# Altium PCB PCB1.PcbDoc
Units mm, origin at the board's own origin, x right, y up, seen from the top; angles counter-clockwise.
Board outline 88 x 76.5 mm, 4 copper layers (Top Layer, Int1 (GND), Int2 (PWR), Bottom Layer), stack 1.57 mm thick; 44 components, 65 nets, 257 pads, 114 vias.
Unrouted connection lines stored in the file: 24.
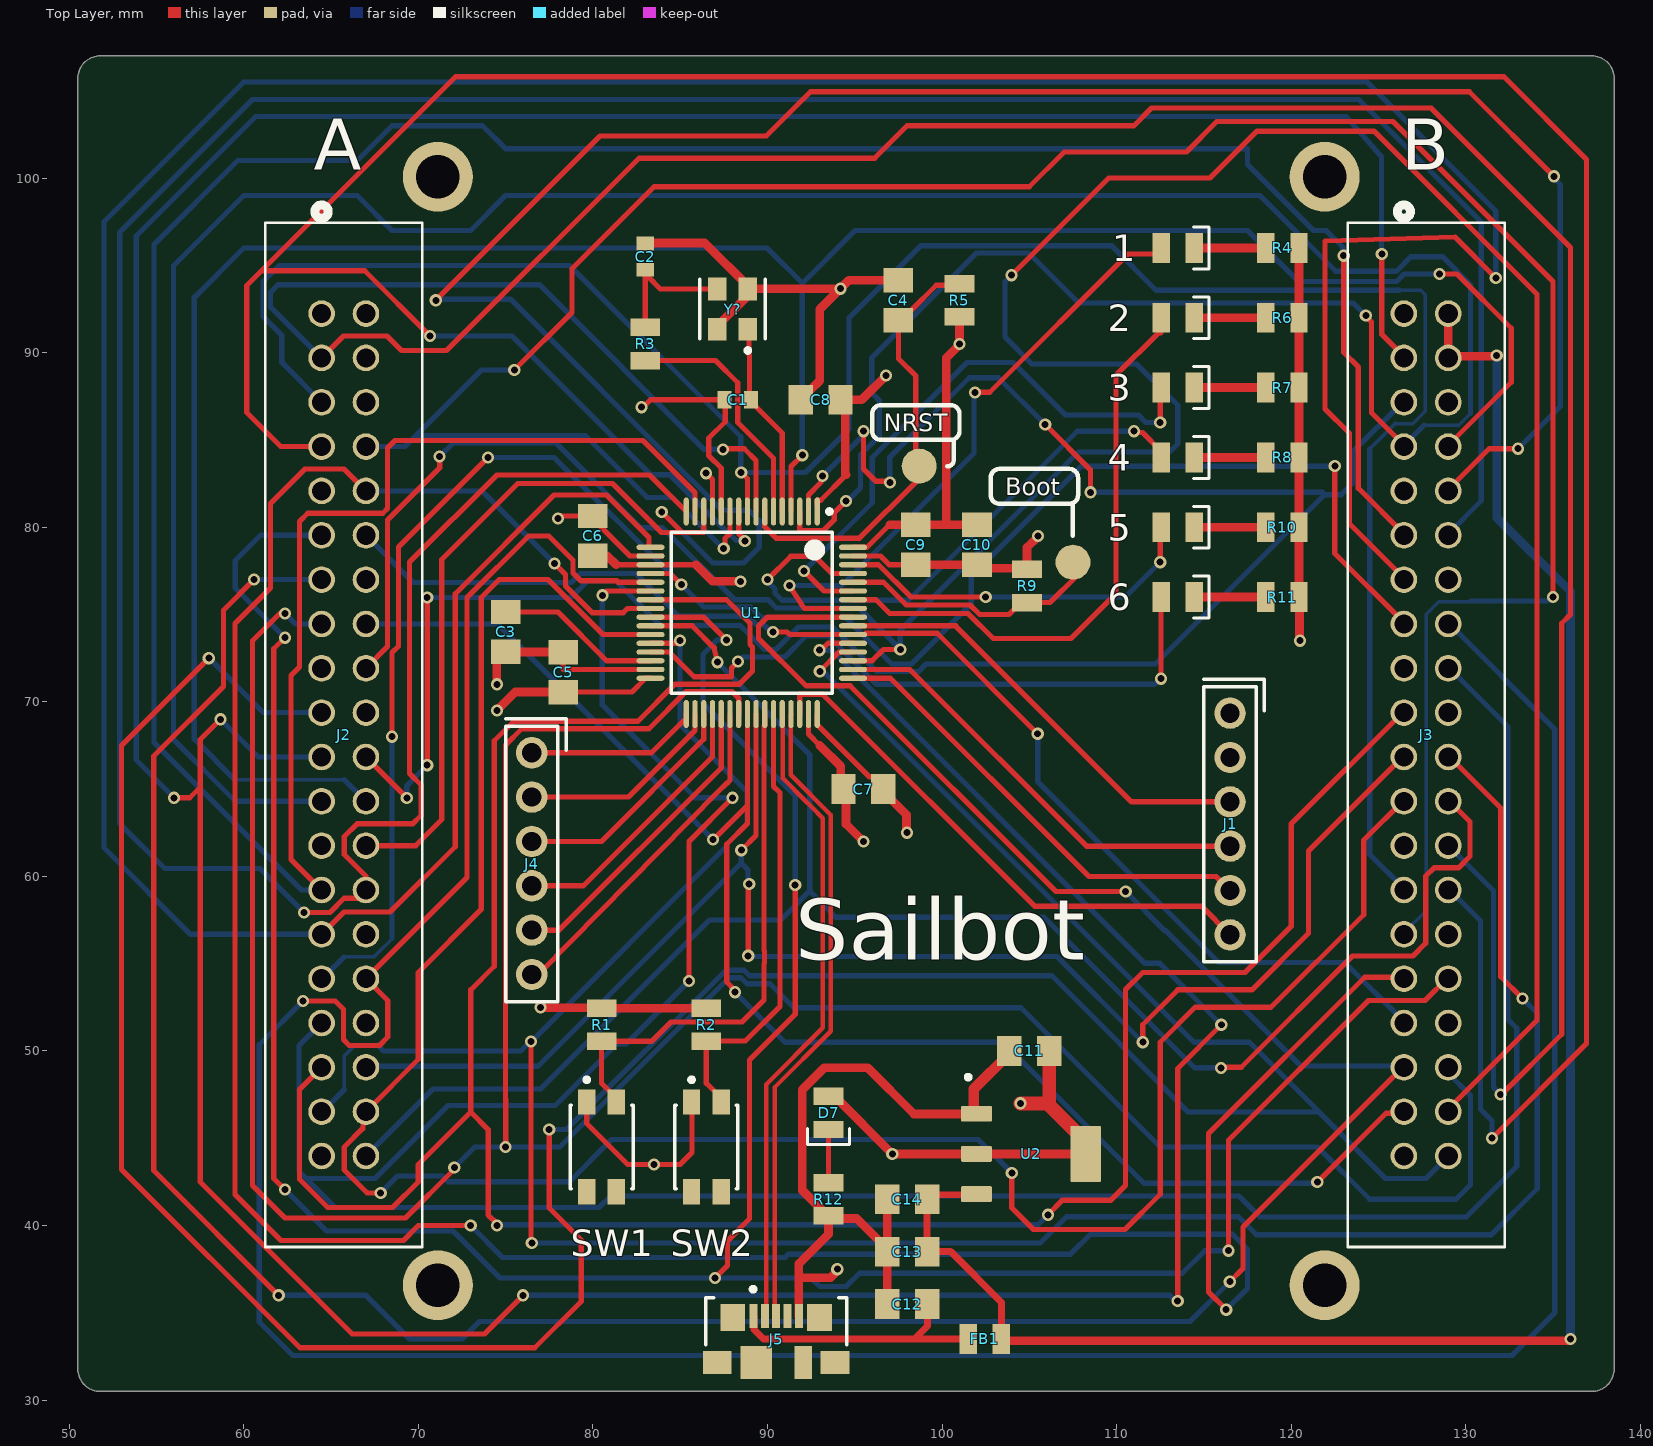
[diagram p0: Top Layer view]
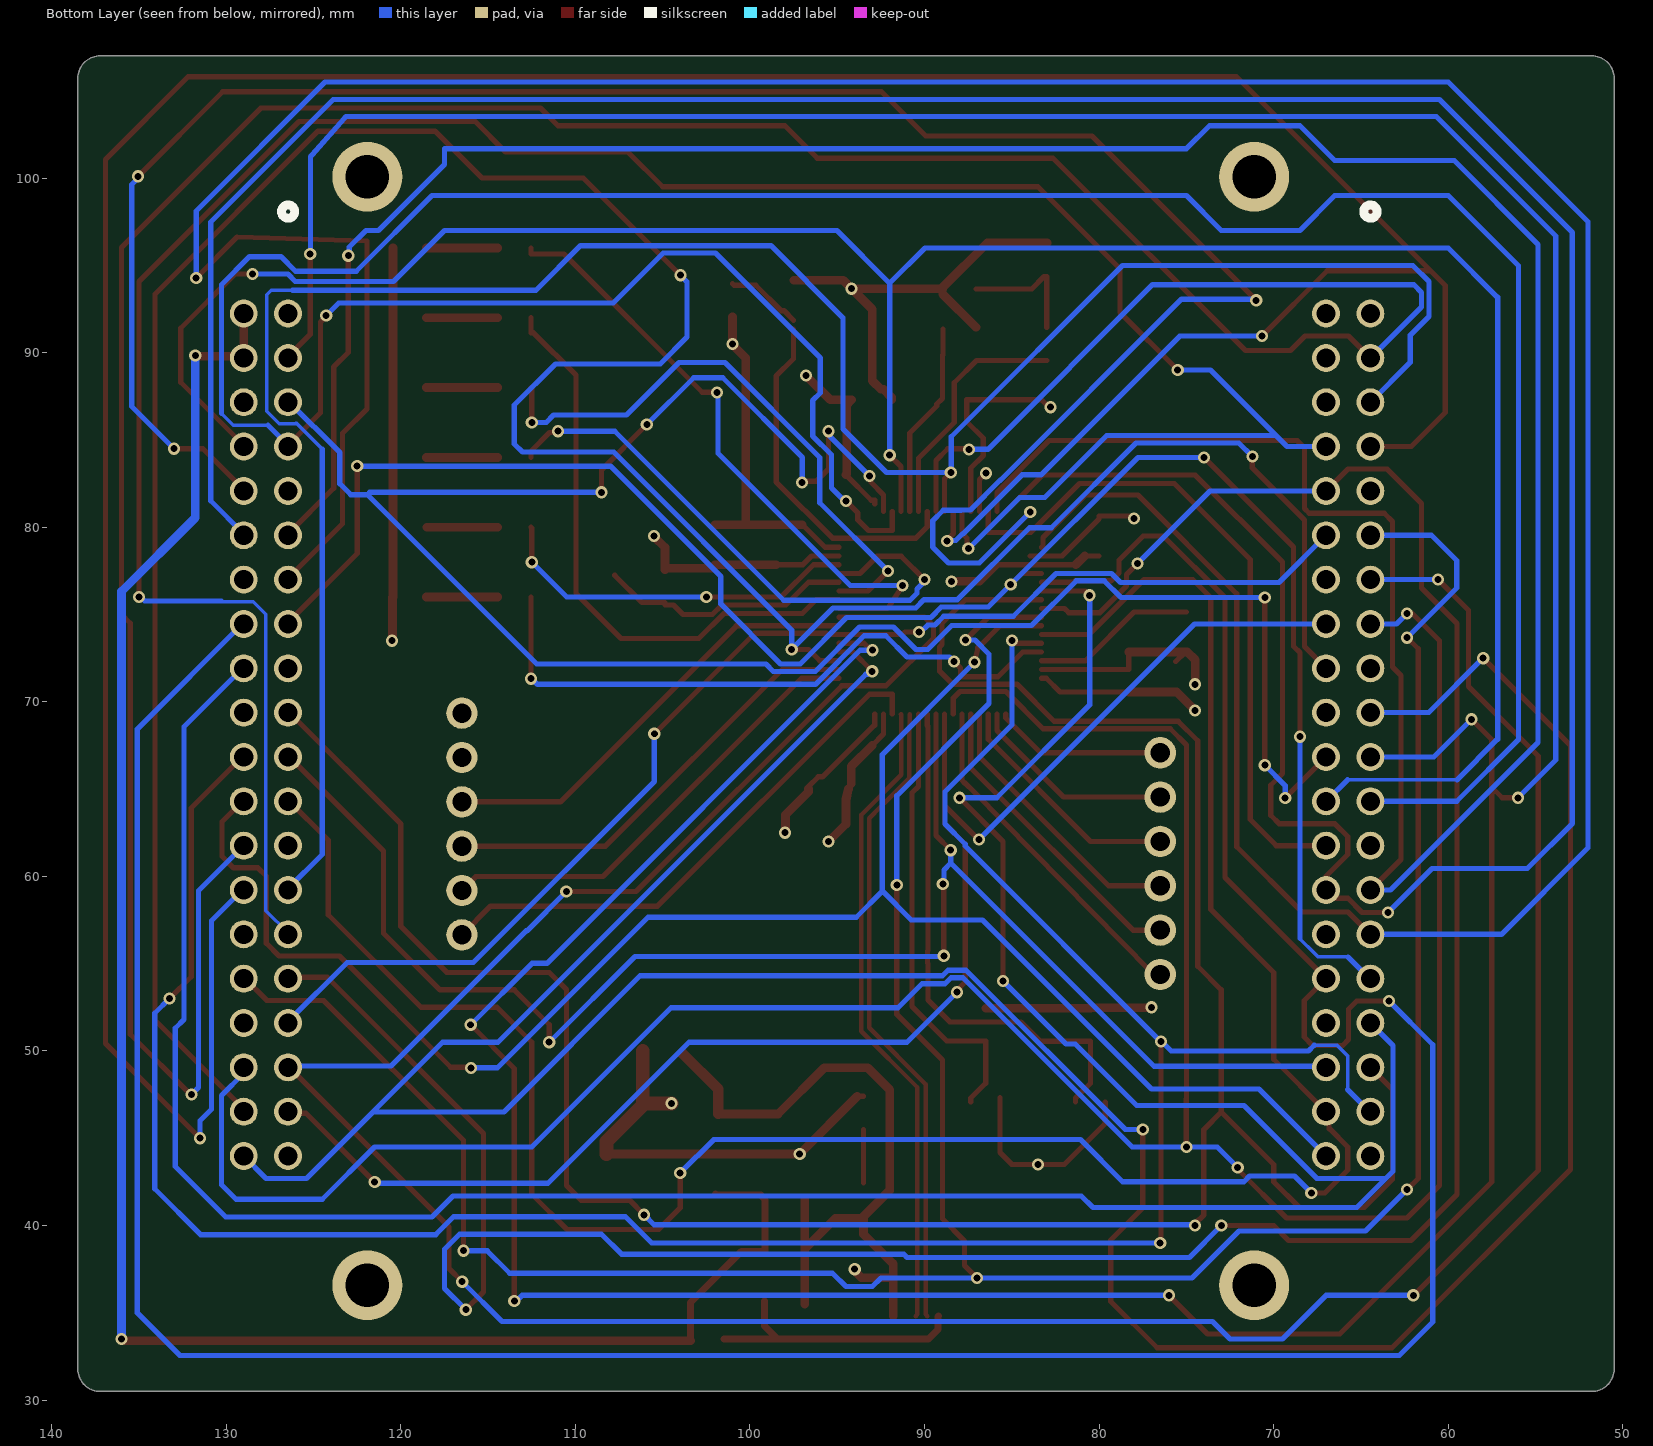
[diagram p1: Bottom Layer view, seen from below]
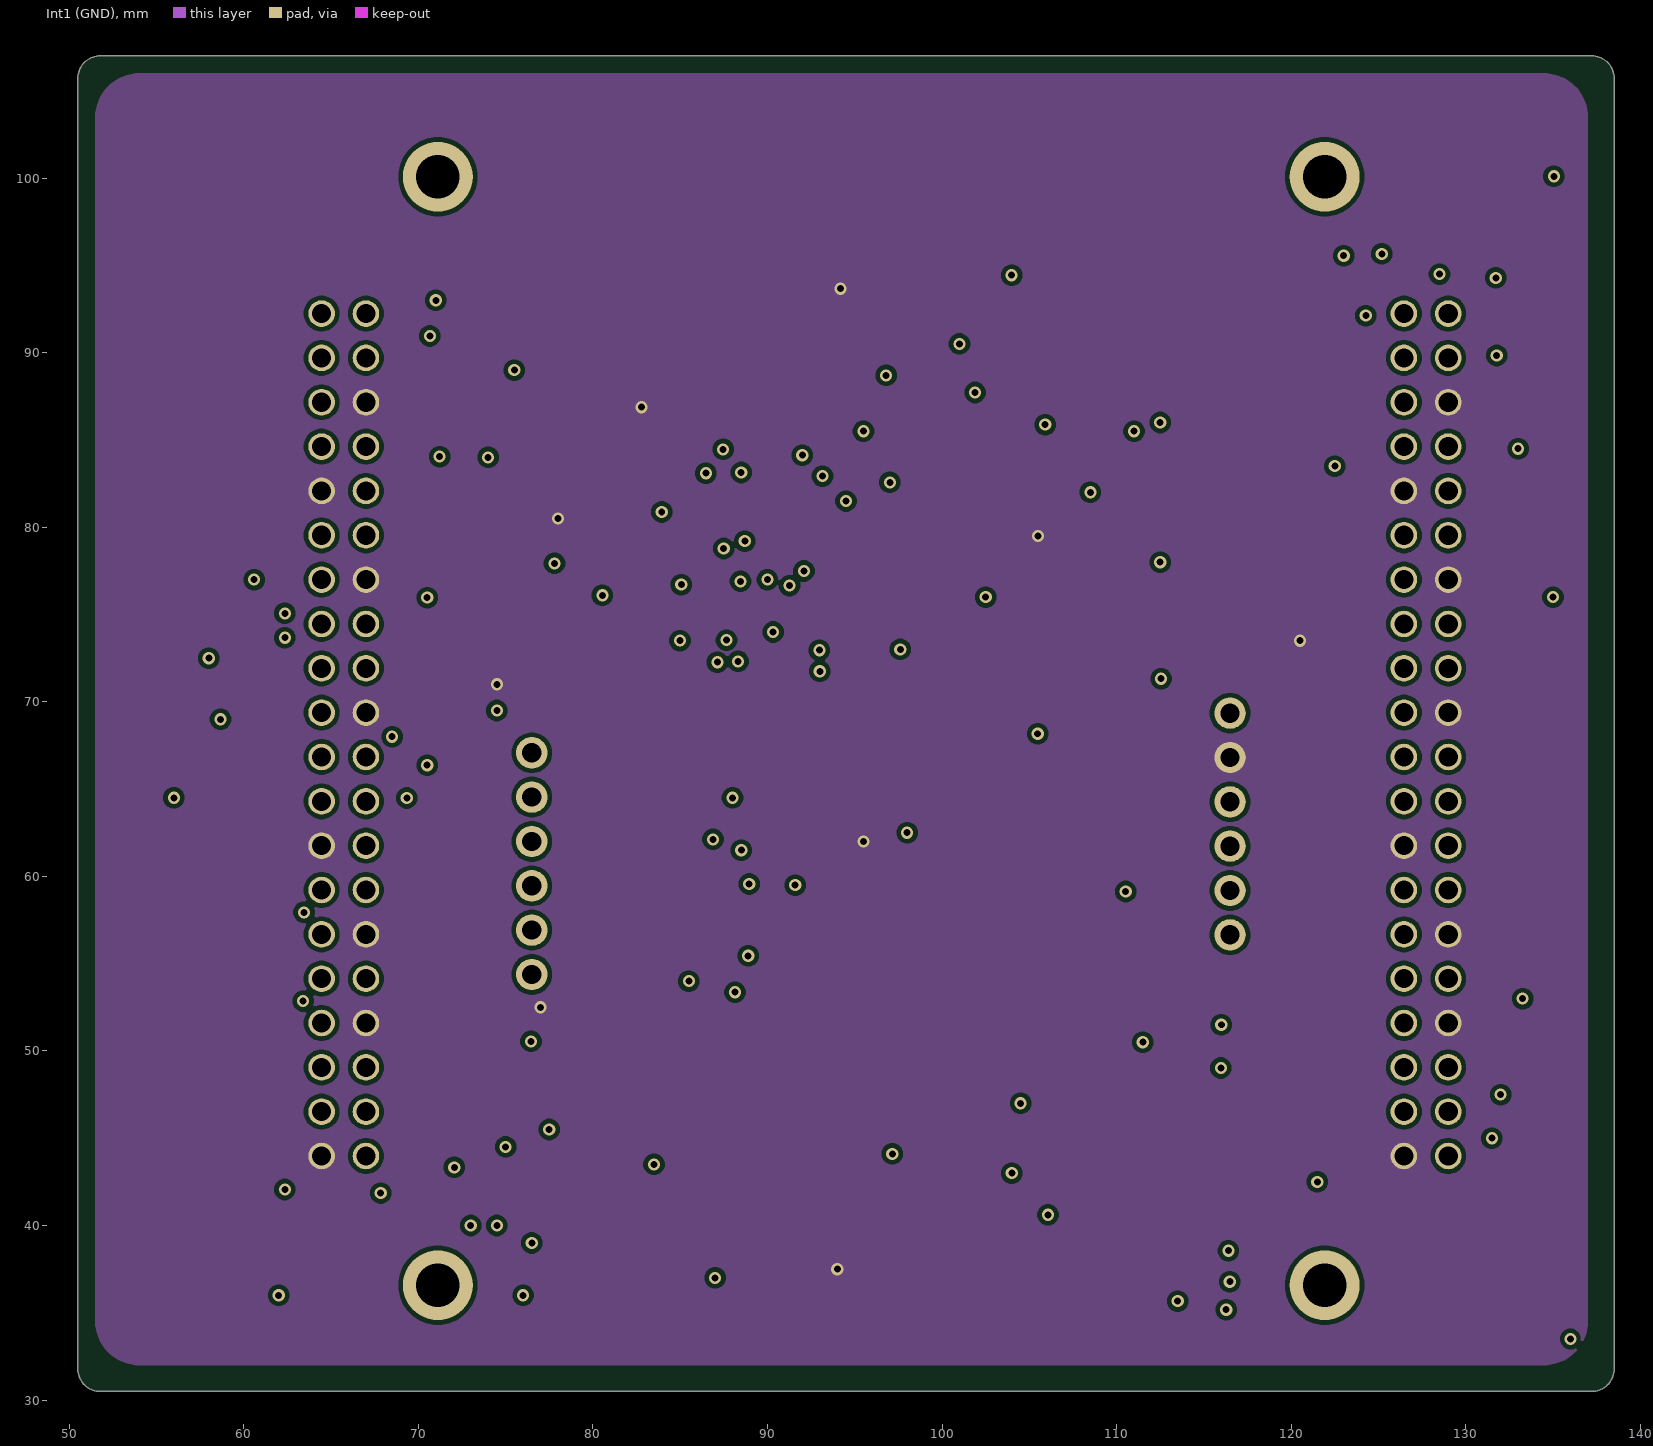
[diagram p2: Int1 (GND)]
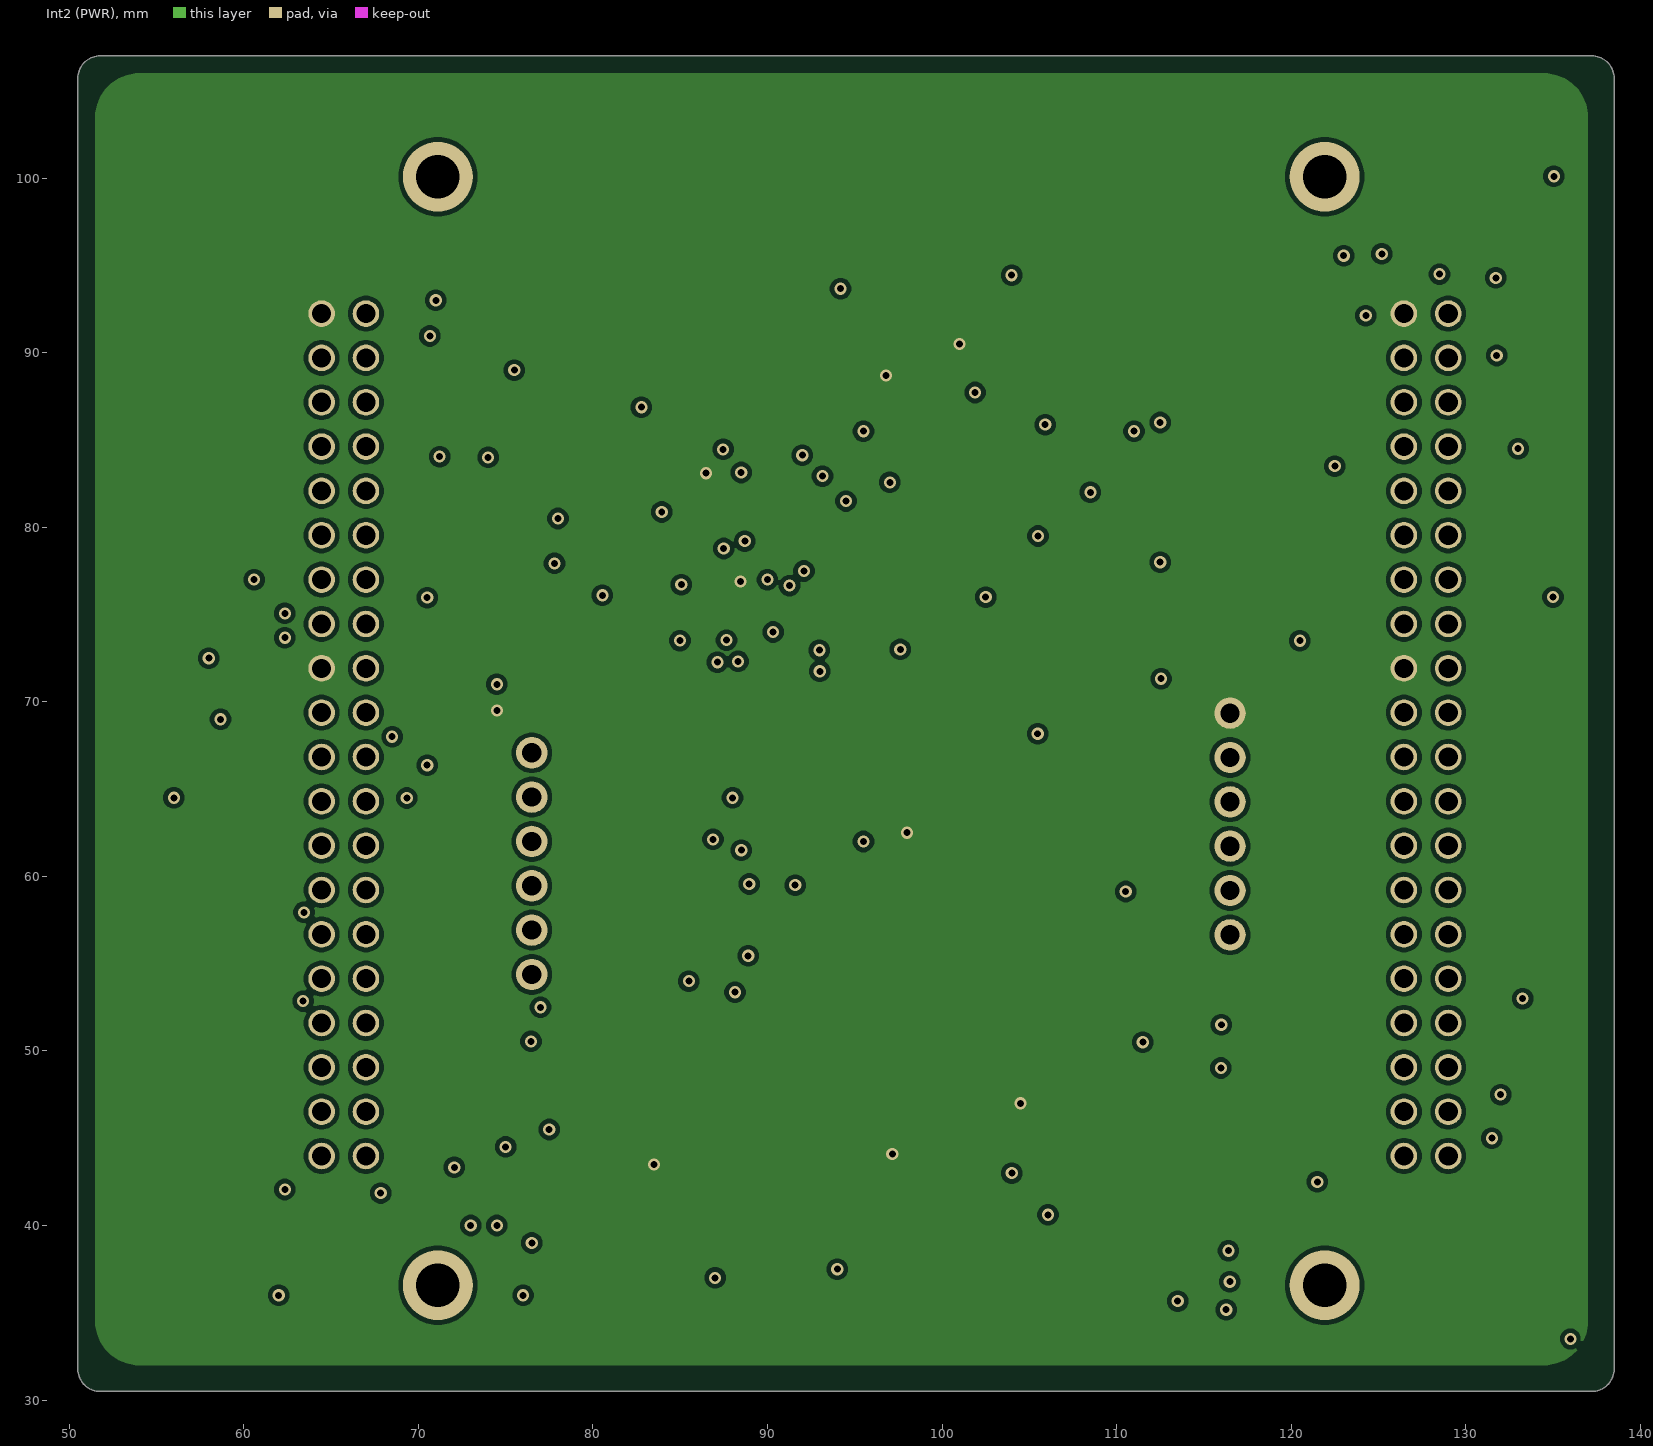
[diagram p3: Int2 (PWR)]
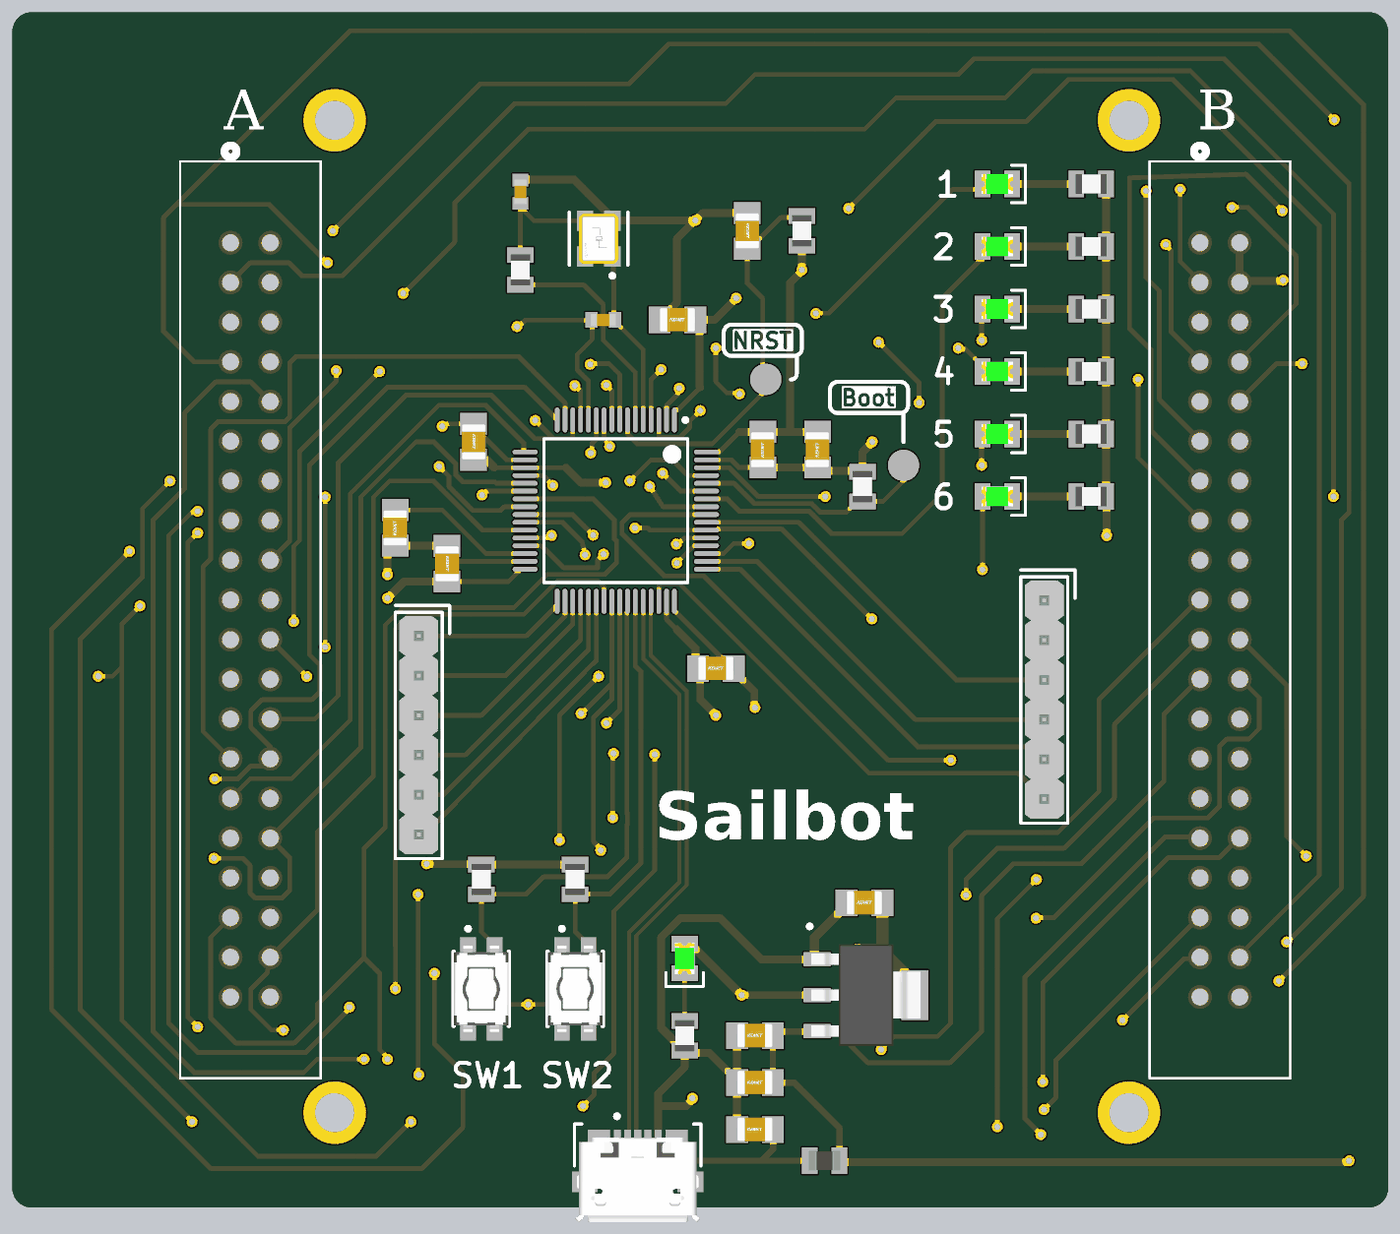
[diagram p4: 3D render of the assembled board from above, using the file's embedded part models]

## Layer stack, top to bottom
Top Solder: solder mask 0.0254, SM-001, Dk 4
Top Layer: signal copper 0.035
Dielectric 1: prepreg 0.2, PP-017, Dk 4.6
Int1 (GND): signal copper 0.0175
Dielectric 3: core 1.065, Core-039, Dk 4.6
Int2 (PWR): signal copper 0.0175
Dielectric 5: prepreg 0.2, PP-017, Dk 4.6
Bottom Layer: signal copper 0.035
Bottom Solder: solder mask 0.0254, SM-001, Dk 4

## Board outline
50.5,31.77 ccw(c51.77,31.77) 51.77,30.5 137.23,30.5 ccw(c137.23,31.77) 138.5,31.77 138.5,105.73 ccw(c137.23,105.73) 137.23,107 51.77,107 ccw(c51.77,105.73) 50.5,105.73

## Design rules (kind name [scope] priority, off if disabled: settings)
Clearance [All] p1: gap=0.254 ignorepadtopadclearanceinfootprint=FALSE except(0: Arc-Hole Track-Hole SMDPad-Hole THPad-Hole Via-Hole Fill-Hole Poly-Hole Region-Hole Text-Hole; 0.127: Arc-Arc Arc-Track Arc-SMDPad Track-Track Track-SMDPad SMDPad-SMDPad; 0.33: Arc-THPad Arc-Via Track-THPad Track-Via SMDPad-THPad SMDPad-Via THPad-Via Via-Via; 0.5: THPad-THPad)
DiffPairsRouting [All] p1: maxlimit=0.203 minlimit=0.2 mostfreqgap=0.203 toplayer_mingap=0.203 toplayer_minwidth=0.26 toplayer_maxwidth=0.26 toplayer_prefwidth=0.26 bottomlayer_mingap=0.203 bottomlayer_minwidth=0.26 bottomlayer_maxwidth=0.26 bottomlayer_prefwidth=0.26 impedanceprofiledriven=TRUE impedanceprofileid={DC90BCA8-596F-43B1-B6F6-F5653955A0C4} impedanceprofilevalue=90.000000 maxuncoupledlength=12.7
HoleSize [IsVia] p1: absolutevalues=TRUE maxlimit=2.54 minlimit=0 maxpercent=80.000 minpercent=20.000
PolygonConnect [All] p1: connectstyle=Direct reliefconductorwidth=0.254 reliefentries=4 polygonreliefangle="90 Angle" airgapwidth=0.254
RoutingVias [All] p1: holewidth=0.4 width=0.7 viastyle="Through Hole" minholewidth=0.3 minwidth=0.55 maxholewidth=0.4 maxwidth=0.9
SolderMaskExpansion [All] p1: expansion=0.102 istentingtop=FALSE
UnRoutedNet [All] p1: checkbadconnections=TRUE
Width [All] p1: maxlimit=1 minlimit=0.13 preferedwidth=0.3 midlayer1_minwidth=0.254 midlayer1_maxwidth=0.254 midlayer1_prefwidth=0.254 midlayer2_minwidth=0.254 midlayer2_maxwidth=0.254 midlayer2_prefwidth=0.254 minimp=50.000000 maximp=50.000000 favimp=50.000000
27 further rules are at their usual default settings.

## Classes and differential pairs
differential pair USB_D: +USB_D_P -USB_D_N

## Components (designator, comment, footprint, x,y, rotation, side; value= is the part's Value field where it differs from the comment)
1 "GREEN" LED_0805_GREEN 113.5,96 r180 top (schematic designator D1)
2 "GREEN" LED_0805_GREEN 113.5,92 r180 top (schematic designator D2)
3 "GREEN" LED_0805_GREEN 113.5,88 r180 top (schematic designator D3)
4 "GREEN" LED_0805_GREEN 113.5,84 r180 top (schematic designator D4)
5 "GREEN" LED_0805_GREEN 113.5,80 r180 top (schematic designator D5)
6 "GREEN" LED_0805_GREEN 113.5,76 r180 top (schematic designator D6)
C1 "28pF" CAP_0603 88.3,87.3 r180 top
C2 "28pF" CAP_0603 83,95.5 r90 top
C3 "2.2uF" CAP_0805 75,74 r90 top
C4 "100nF" CAP_0805 97.5,93 r270 top
C5 "100nF" CAP_0805 78.3,71.7 r270 top
C6 "100nF" CAP_0805 80,79.5 r270 top
C7 "100nF" CAP_0805 95.5,65 r0 top
C8 "100nF" CAP_0805 93.043,87.3 r0 top
C9 "100nF" CAP_0805 98.5,79 r90 top
C10 "2.2uF" CAP_0805 102,79 r90 top
C11 "22uF" CAP_0805 105,50 r0 top
C12 "2.2uF" CAP_0805 98,35.5 r0 top
C13 "2.2uF" CAP_0805 98,38.5 r0 top
C14 "22uF" CAP_0805 98,41.5 r0 top
D7 "GREEN" LED_0805_GREEN 93.5,46.45 r90 top
FB1 "120R" FB_0805 102.45,33.5 r0 top
J1 "G800W302018EU" G800W302018EU 116.5,63 r0 top
J2 "BUFFER_LOW" CONN_3020-40-0100-00_CNC 64.46,92.24 r270 top
J3 "BUFFER_HIGH" CONN_3020-40-0100-00_CNC 126.46,92.24 r270 top
J4 "G800W302018EU" G800W302018EU 76.5,60.73 r0 top
J5 "473460001" FP-473460001-MFG 90.5,32.5 r0 top
R1 "10k" RES_0805 80.5,51.5 r270 top
R2 "10k" RES_0805 86.5,51.5 r270 top
R3 "0R" RES_0805 83,90.5 r90 top
R4 "1k" RES_0805 119.5,96 r180 top
R5 "10k" RES_0805 101,93 r270 top
R6 "1k" RES_0805 119.5,92 r180 top
R7 "1k" RES_0805 119.5,88 r180 top
R8 "1k" RES_0805 119.5,84 r180 top
R9 "10k" RES_0805 104.874,76.635 r270 top
R10 "1k" RES_0805 119.5,80 r180 top
R11 "1k" RES_0805 119.5,76 r180 top
R12 "1k" RES_0805 93.5,41.5 r90 top
SW1 "EVQ-P2402M" FP-EVQ-P2402M-MFG 80.5,44.5 r0 top
SW2 "EVQ-P2402M" FP-EVQ-P2402M-MFG 86.5,44.5 r0 top
U1 "STM32F401RBT6TR" STM-LQFP64_L 89.1,75.1 r270 top
U2 "TLV1117LV33DCYR" DCY0004A_N 105.1,44.1 r0 top
Y? "ABM8-24.000MHZ-B2-T" FP-ABM8-MFG 88,92.5 r90 top

## Footprints (in the part's own frame and the unit in brackets; to place one, negate y for a bottom-side part, rotate by r counter-clockwise, add the part's x,y. Pads: shape width x height; smd on the part's side, far side on the other; paste and mask are expansions set on the pad)
CAP_0603 [mm]
  rect 0.8x1 smd: 1(-0.75,0) 2(0.75,0)
  body extent -0.8,-0.4 0.8,0.4, height 0.51
CAP_0805 [mm]
  rect 1.4x1.7 smd: 1(-1.143,0) 2(1.143,0)
  body extent -1.15,-0.76 1.15,0.79, height 1.01
CONN_3020-40-0100-00_CNC [mil]
  round 60 / inner round 60 / far side round 63 hole 43 paste-31.5 mask-31.5: 1(0,0) 2(0,100) 3(100,0) 4(100,100) 5(200,0) 6(200,100) 7(300,0) 8(300,100) 9(400,0) 10(400,100) 11(500,0) 12(500,100) 13(600,0) 14(600,100) 15(700,0) 16(700,100) 17(800,0) 18(800,100) 19(900,0) 20(900,100) 21(1000,0) 22(1000,100) 23(1100,0) 24(1100,100) 25(1200,0) 26(1200,100) 27(1300,0) 28(1300,100) 29(1400,0) 30(1400,100) 31(1500,0) 32(1500,100) 33(1600,0) 34(1600,100) 35(1700,0) 36(1700,100) 37(1800,0) 38(1800,100) 39(1900,0) 40(1900,100)
  silkscreen extent -245,-127 2105,227
DCY0004A_N [mm] "SOT223, 4-Leads, Body 6.7x3.7mm, Pitch 2.3mm, IPC Medium Density"
  rrect11% 1.75x0.9 smd: 1(-3.125,2.3) 2(-3.125,0) 3(-3.125,-2.3)
  rrect6% 1.75x3.2 smd: 4(3.125,0)
  silkscreen extent -3.72,4.28 -3.47,4.52, body extent -3.5,-3.25 3.5,3.25, height 1.62
FB_0805 [mm]
  rect 1x1.7 smd: 1(-0.95,0) 2(0.95,0)
  body extent -1,-0.63 1,0.63, height 0.86
FP-473460001-MFG [mm]
  rect 0.45x1.38 smd paste+0 mask+0: 1(-1.3,2.31) 2(-0.65,2.31) 3(0,2.31) 4(0.65,2.31) 5(1.3,2.31)
  rect 1.425x1.55 smd paste+0 mask+0: 6(-2.487,2.225) 7(2.488,2.225)
  rect 1.65x1.3 smd paste+0 mask+0: 8(-3.375,-0.35) 11(3.375,-0.35)
  rect 1.8x1.9 smd paste+0 mask+0: 9(-1.15,-0.35)
  rect 1x1.9 smd paste+0 mask+0: 10(1.55,-0.35)
  silkscreen extent -4.05,0.67 4.04,3.97, body extent -4.3,-2.48 4.3,3.45, height 0.25
FP-ABM8-MFG [mm]
  rect 1.3x1.05 smd paste+0 mask+0: 1(-1.15,-0.875) 2(1.15,-0.875) 3(1.15,0.875) 4(-1.15,0.875)
  silkscreen extent -2.5,-1.88 1.7,1.88, body extent -1.9,-1.5 1.9,1.5, height 0.25
FP-EVQ-P2402M-MFG [mm]
  rect 1x1.45 smd paste+0 mask+0: 1(-0.85,2.575) 2(0.85,2.575) 3(-0.85,-2.575) 4(0.85,-2.575)
  silkscreen extent -1.8,-2.4 1.8,3.97, body extent -1.9,-3.4 1.9,3.4, height 0.25
G800W302018EU [mm]
  round 1.8 hole 1.1 mask+0.07: 1(0,6.35) 2(0,3.81) 3(0,1.27) 4(0,-1.27) 5(0,-3.81) 6(0,-6.35)
  silkscreen extent -1.5,-7.9 1.97,8.3, body extent -1.25,-7.62 1.25,7.62, height 8.61
LED_0805_GREEN [mm]
  rect 1x1.7 smd: A(0.95,0) K(-0.95,0)
  silkscreen extent -1.8,-1.2 -0.9,1.2, body extent -1,-0.63 1,0.63, height 1.12
RES_0805 [mm]
  rect 1x1.7 smd: 1(-0.95,0) 2(0.95,0)
  body extent -1,-0.63 1,0.63, height 0.47
STM-LQFP64_L [mm] "QFP, 64-Leads, Body 10x10mm, Pitch 0.5mm, IPC High Density"
  oval 1.6x0.3 smd: 1(-5.8,3.75) 2(-5.8,3.25) 3(-5.8,2.75) 4(-5.8,2.25) 5(-5.8,1.75) 6(-5.8,1.25) 7(-5.8,0.75) 8(-5.8,0.25) 9(-5.8,-0.25) 10(-5.8,-0.75) 11(-5.8,-1.25) 12(-5.8,-1.75) 13(-5.8,-2.25) 14(-5.8,-2.75) 15(-5.8,-3.25) 16(-5.8,-3.75) 33(5.8,-3.75) 34(5.8,-3.25) 35(5.8,-2.75) 36(5.8,-2.25) 37(5.8,-1.75) 38(5.8,-1.25) 39(5.8,-0.75) 40(5.8,-0.25) 41(5.8,0.25) 42(5.8,0.75) 43(5.8,1.25) 44(5.8,1.75) 45(5.8,2.25) 46(5.8,2.75) 47(5.8,3.25) 48(5.8,3.75)
  oval 0.3x1.6 smd: 17(-3.75,-5.8) 18(-3.25,-5.8) 19(-2.75,-5.8) 20(-2.25,-5.8) 21(-1.75,-5.8) 22(-1.25,-5.8) 23(-0.75,-5.8) 24(-0.25,-5.8) 25(0.25,-5.8) 26(0.75,-5.8) 27(1.25,-5.8) 28(1.75,-5.8) 29(2.25,-5.8) 30(2.75,-5.8) 31(3.25,-5.8) 32(3.75,-5.8) 49(3.75,5.8) 50(3.25,5.8) 51(2.75,5.8) 52(2.25,5.8) 53(1.75,5.8) 54(1.25,5.8) 55(0.75,5.8) 56(0.25,5.8) 57(-0.25,5.8) 58(-0.75,5.8) 59(-1.25,5.8) 60(-1.75,5.8) 61(-2.25,5.8) 62(-2.75,5.8) 63(-3.25,5.8) 64(-3.75,5.8)
  silkscreen extent -5.92,-4.6 4.6,4.6, body extent -5,-5 5,5, height 1.6

## Part data
1 2 3 4 5 6 D7: library part LED_0805_GREEN, "LED 0805 GREEN SMD"
C1 C2: library part CAP_0603_16V, "Capacitor SMD 0603 16V"
C3 C4 C5 C6 C7 C8 C9 C10 C11 C12 C13 C14: library part CAP_0805_16V, "Capacitor SMD 0805 16V"
FB1: library part FB_0805, "Ferrite Bead SMD 0805"
J1 J4: "Pin Header 6 Position 2.54mm Pitch", Manufacturer=Amphenol, Manufacturer Part Number=G800W302018EU
J2 J3: library part 3020-40-0100-00, "No Description Available", Mfr_Name="CNC Tech", RefDes=RefDes, Type=Type
J5: library part CMP-2000-05246-2, "CONN RCPT USB2.0 MICRO B SMD R/A", Current Rating=1.8A, Manufacturer=Molex, Package=0, Temperature="-30°C to +85°C", Temperature Range High=+85°C, Temperature Range Low=-30°C, Voltage Rating=30V, Automotive=No, Category=Conn, ComponentLink2Description=Datasheet, ComponentLink2URL=https://www.molex.com/webdocs/datasheets/pdf/en-us/0473460001_IO_CONNECTORS.pdf, Conn Orientation="Right Angle", Contact Material=Gold,Nickel, Device Class L1=Connectors, Device Class L2="USB Connectors", Device Class L3=unset, Digikey Description="CONN RCPT USB2.0 MICRO B SMD R/A", Footprint Url=https://www.molex.com/pdm_docs/sd/473460001_sd.pdf, Height=2.945mm, Is Female=yes, Lead Free=Yes, Manufacturer Part Number=473460001, Number Of Contacts=5, Octopart=https://octopart.com/47346-0001-molex-7164928, Pitch=0.65mm, RoHS=TRUE, Shielding=true, Usb Standard="USB 2.0"
R1 R2 R3 R4 R5 R6 R7 R8 R9 R10 R11 R12: library part RES_0805, "Resistor SMD 0805"
SW1 SW2: library part CMP-05618-000087-1, "SWITCH TACTILE SPST-NO 0.02A 15V", Actuator Color=Natural, Color=Clear, Contact Current Rating=20mA, Contact Resistance=100mR, Max Operating Temperature=85°C, Max Voltage Rating (DC)=15V, Min Operating Temperature=-40°C, Operating Force=2.4N, Package Quantity=1, Actuator Length=0.45mm, Current Rating=20mA, Depth=5.5mm, Electrical Life=500000Cycles, Height=2.1mm, Illumination Type=Non-Illuminated, Lead Free="Lead Free", Length=3.5mm, Max Current Rating=20mA, Mechanical Life=500000Cycles, Mount="Surface Mount", Orientation=Straight, Packaging="Tape and Reel", Radiation Hardening=No, REACH SVHC="No SVHC", RoHS Compliant=Yes, Series=EVQP2, Size=3.5mm, Switch Function=Off-Mom, Switch Travel=0.25mm, Termination=J-Bend, Throw Configuration=SPST, Voltage Rating (DC)=15V, Width=3.5mm
U1: library part CMP-0243-00143-1, "ARM Cortex-M4 32-bit MCU+FPU, 128 KB Flash, 64 KB Internal RAM, 50 I/Os, 64-Pin LQFP, -40 to 85 degC, Tape and Reel", I/Os (High Current)=50, Operating Frequency(F) (Processor speed) (MHz)=84, Package Description=LQFP64, Package Reference="64-Pin Low-profile Quad Flat Package, Body 10 x 10 mm, Pitch 0.5 mm", Supply Voltage(Vcc) min (V)=1.7, ComponentLink1Description="Manufacturer URL", ComponentLink1URL=http://www.st.com/, ComponentLink2Description=Datasheet, ComponentLink2URL=http://www.st.com/st-web-ui/static/active/en/resource/technical/document/datasheet/DM00086815.pdf, Core="ARM Cortex-M4", DatasheetVersion="Rev. 5", FLASH Size (Prog) (kB)=128, Internal RAM Size (kB)=64, Mounting Technology="Surface Mount", Packing="Tape and Reel"
U2: library part CMP-0395-00503-2, "Single Output LDO, 1 A, Fixed 3.3 V Output, 2 to 5.5 V Input, 4-pin SOT-223 (DCY), -40 to 125 degC, Green (RoHS & no Sb/Br)", Manufacturer="Texas Instruments", Accuracy(%)=2, Code_JEDEC=TO-261, ComponentLink1Description="Manufacturer URL", ComponentLink1URL=http://www.ti.com/, ComponentLink2Description=Datasheet, ComponentLink2URL=http://www.ti.com/general/docs/lit/getliterature.tsp?genericPartNumber=TLV1117LV33&fileType=pdf, ComponentLink3Description="Package Specification", ComponentLink3URL=http://www.ti.com/litv/pdf/mpds094a, DatasheetVersion=SBVS160A, Eco-Plan="Green (RoHS & no Sb/Br)", Fixed Output Options(V)=3.3, Iout(Max)(A)=1, Iq(Typ)(mA)=0.05, Mounting Technology="Surface Mount", PackageDescription="4-Pin Plastic Small Outline, Body 3.5 x 6.5 mm, Pitch 2.3 mm", PackageReference=DCY0004A, PackageVersion=4202506/B, PartNumber=TLV1117LV33DCYR, SubFamily="Single Channel LDO", Vdo(Typ)(mV)=1200, Vin(Max)(V)=5.5, Vin(Min)(V)=2, Vout Adj(Max)(V)=3.3, Vout Adj(Min)(V)=3.3
Y?: library part CMP-27762-000036-1, "Crystal 24MHz ±20ppm 18pF SMD-4 3.2mm x 2.5mm", Case/Package=CSMD, ESR (Equivalent Series Resistance)=50R, Frequency=24MHz, Frequency Stability=50ppm, Frequency Tolerance=20ppm, Load Capacitance=18pF, Max Operating Temperature=70°C, Min Operating Temperature=-20°C, Operating Frequency="24 MHz", Package Quantity=1000, Resistor Type=Ceramic, Accuracy=20ppm, Depth=2.5mm, Height=0.031inch, Lead Free="Lead Free", Length=3.2mm, Mount="Surface Mount", Number of Pins=4, Packaging="Tape and Reel", Radiation Hardening=No, REACH SVHC="No SVHC", RoHS Compliant=Yes, Series=ABM8, Series Resistance=50R, Termination=SMD/SMT, Tolerance=20ppm, Width=2.5mm

## Free pads (board coordinates)
  round 4 hole 2.5: 1(71.12,36.576) 1(71.12,100.076) 1(121.92,36.576) 1(121.92,100.076)
  round 2 smd: 2(107.502,77.998) 3(98.692,83.502)

## Via types
v1: diameter 0.7, hole 0.4, Top Layer to Bottom Layer, 114 vias

## Nets (pads, with @x,y where several pads share a name; then routed paths per layer and width w, separated by ;. In a path a pad name is that pad's centre, name@x,y a point inside that pad or via, vN(x,y) a via of type N, cw(c..) or ccw(c..) an arc to the next point about the centre after c; other vN are vias at no path point)
3V3: C5.2 C6.2 C7.2 C8.2 C9.2 C10.2 C11.2 D7.A J1.1 J2.1 J2.17 J3.1 J3.17 R5.2 SW1.1 SW2.1 U1.1 U1.13 U1.19 U1.32 U1.48 U1.64 U2.2 U2.4 | length 96.4
  Top Layer w0.3: C5.2 82.233,70.557 83.026,71.35 U1.32 ; SW1.1 79.65,45.85 82,43.5 v1(83.5,43.5) 85,43.5 85.685,44.185 SW2.1@85.685,47.335 ; C6.2 C6.2@80.825,78.357 ; 81.332,77.85 U1.19 85.903,77.85 ; v1(86.476,83.098) 86.493,83.098 86.85,82.741 U1.13 ; U1.48 92.85,68.65 92.904,68.65 95.854,65.7 96.093,65.7 96.643,65.15 C7.2 ; U1.1@92.85,81.35 92.85,81.55 93.05,81.55 94.5,83 ; D7.A D7.A@93.85,47.4 ; U1.64 95.707,78.85 97,80.143
  Top Layer w0.5: v1(74.5,69.5) 75.557,70.557 C5.2 ; C6.2@80.825,78.357 81.332,77.85 ; 85.903,77.85 86.854,76.898 v1(88.456,76.898) ; D7.A@93.85,47.4 v1(97.15,44.1) U2.4 ; 94.5,83 94.462,83.038 94.462,87.024 C8.2 95.403,87.3 v1(96.799,88.697) ; C7.2 96.643,64.85 97.962,63.531 97.962,62.538 v1(98,62.5) ; 97,80.143 C9.2 100.25,80.143 ; R5.2 101,90.446 100.25,89.696 100.25,80.143 ; C10.2 100.25,80.143
  Top Layer w0.8: v1(104.5,47) 106.05,47 ; C11.2 106.143,47.093 106.05,47 ; U2.4 108.225,44.825 106.05,47
  Bottom Layer w0.3: J1.1@116.35,69.5 J1.1
  other v1: 101,90.5
5V: C13.2 C14.2 FB1.2 J3.2 J3.4 U2.3 | length 109.6
  Top Layer w0.4: U2.3 101.937,41.762 99.405,41.762 C14.2 C13.2 100.5,38.5 103.4,35.6 FB1.2
  Top Layer w0.5: FB1.2@103.4,33.403 135.849,33.403 135.946,33.5 v1(136,33.5) ; J3.2 J3.4 129.102,89.802 131.738,89.802 v1(131.777,89.84)
  Bottom Layer w0.5: v1(131.777,89.84) 131.777,80.538 136,76.315 v1(136,33.5)
GND: C1.2 C2.2 C3.1 C4.1 C5.1 C6.1 C7.1 C8.1 C9.1 C10.1 C11.1 C12.1 C13.1 C14.1 J1.2 J2.6 J2.9 J2.14 J2.20 J2.25 J2.30 J2.34 J2.39 J3.6 J3.9 J3.14 J3.20 J3.25 J3.30 J3.34 J3.39 J5.5 R1.1 R2.1 R4.1 R6.1 R7.1 R8.1 R9.1 R10.1 R11.1 R12.1 U1.12 U1.18 U1.31 U1.47 U1.63 U2.1 Y?.2 Y?.4 | length 152.8
  Top Layer w0.3: C3.1 75.056,72.857 C3.1@75.606,72.307 ; v1(78,80.5) 78.108,80.5 78.251,80.643 C6.1 80,80.467 82.117,78.35 U1.18 U1.18@83.95,78.35 ; C5.1 78.3,71.85 U1.31 ; v1(82.778,86.878) 82.886,86.878 83.308,87.3 87.582,87.3 87.582,86.047 86.631,85.096 86.631,84.117 87.35,83.398 U1.12 ; Y?.4@87.05,91.35 Y?.4@87.05,91.45 ; Y?.2@88.95,93.35 88.95,93.643 Y?.2@88.95,93.75 ; C8.1 C8.1@91.991,87.391 ; U1.47 92.35,68.15 93,67.5 ; U1.63 96.472,78.35 96.965,77.857 C9.1 ; C11.1@103.857,49.85 C11.1
  Top Layer w0.5: v1(74.5,71) 74.5,72.407 74.95,72.857 C3.1 ; C3.1@75.056,72.857 C5.1@78.286,72.857 ; v1@77.025,52.475 80.475,52.475 R1.1 R2.1 ; C2.2@82.984,96.284 86.416,96.284 Y?.2@88.95,93.75 ; Y?.4@87.05,91.45 Y?.2@88.95,93.35 ; Y?.2@88.95,93.643 88.965,93.658 v1@94.178,93.658 ; J5.5 91.8,37.8 91.927,37.927 93.5,39.5 R12.1@93.5,40.51 ; C8.1 91.9,87.45 92.35,87.9 92.5,87.9 93,88.4 93,92.48 v1@94.178,93.658 ; 91.927,37 93.607,37 93.9,37.293 93.9,37.346 94,37.446 v1(94,37.5) ; 93,67.5 94.193,66.307 C7.1@94.193,65.314 ; R12.1@93.46,40.55 92,42.01 92,47.783 93.25,49.033 95.75,49.033 98.393,46.39 U2.1@101.805,46.39 ; R12.1@93.643,40.407 95.1,40.407 C13.1@96.857,38.65 ; C7.1 94.5,64.4 94.5,63 v1(95.5,62) ; C12.1 C13.1 C13.1@96.857,38.65 ; C14.1 C13.1@96.857,38.65 ; C4.1 94.663,94.143 v1(94.187,93.667) v1@94.178,93.658 ; C9.1 C10.1 102.204,77.653 R9.1@104.796,77.653 ; R9.1 104.874,78.835 105.5,79.461 v1(105.5,79.5) ; R4.1 R6.1 R7.1 R8.1 R11.1 120.475,75.975 120.475,73.525 v1(120.5,73.5)
  Top Layer w0.6: U2.1@101.805,46.39 101.805,47.798 C11.1@103.857,49.85
  Bottom Layer w0.3: J2.34 J2.34@67.121,51.6
  other v1: 77,52.5
GPIO_3: J2.3 J3.26 U1.8 | length 187.3
  Top Layer w0.3: J2.3 65.717,90.957 68.199,90.957 69.037,90.119 71.619,90.119 82.641,101.141 96.141,101.141 98,103 111,103 112.009,104.009 128.02,104.009 136,96.029 136,75 135.5,74.5 135.5,50.958 132.042,47.5 v1(132,47.5) ; v1(87.461,84.461) 87.5,84.5 88.67,84.5 89.35,83.82 U1.8
  Bottom Layer w0.3: J2.3 61.535,92.625 61.535,93.453 61.978,93.896 76.934,93.896 86.369,84.461 v1(87.461,84.461) ; J3.26 131.587,59.173 131.587,47.913 v1(132,47.5)
GPIO_5: J2.5 J3.27 U1.9 | length 130.9
  Top Layer w0.3: v1(88.494,83.134) 88.85,82.778 U1.9
  Bottom Layer w0.2: 119.338,93.573 119.388,93.623 ; 124.5,84.48 125.99,85.97 126.03,85.93 126.97,85.93 127.69,86.65 127.69,93.31 127.427,93.573 126.198,93.573
  Bottom Layer w0.3: J2.5 62.183,89.438 62.183,90.992 61.108,92.067 61.108,94.077 62.031,95 78.652,95 88.467,85.184 88.467,83.16 v1(88.494,83.134) 92.182,83.134 94.67,85.622 94.67,91.996 98.804,96.13 109.711,96.13 112.267,93.573 119.338,93.573 126.198,93.573 ; 124.5,84.48 124.5,61.26 J3.27@126.46,59.3
GPIO_7: J2.7 J3.28 U1.10 | length 205.7
  Top Layer w0.3: J2.7 62.116,84.62 60.17,86.566 60.17,93.85 61.011,94.691 ; v1(70.663,90.957) 66.929,94.691 61.011,94.691 ; U1.10 88.35,79.65 88.705,79.295 v1(88.705,79.205) ; v1(131.5,45) 136.927,50.427 136.927,101.071 132.188,105.81 72.129,105.81 61.011,94.691
  Bottom Layer w0.3: v1(70.663,90.957) 75.376,90.957 83.334,83 84.417,83 87.804,79.613 87.837,79.613 88.209,79.24 88.67,79.24 v1(88.705,79.205) ; J3.28@129,59.3 130.842,57.458 130.842,46.658 131.5,46 v1(131.5,45)
GPIO_8: J2.8 J3.29 U1.11 | length 148
  Top Layer w0.3: v1(75.5,89) 78.806,92.306 78.806,94.806 83.501,99.501 105.001,99.501 107,101.5 114,101.5 115.74,103.24 125.839,103.24 135,94.079 v1(135,76) ; v1(87.493,78.783) 87.57,78.859 87.57,79.37 87.85,79.65 U1.11
  Bottom Layer w0.2: J3.29@126.46,56.76 127.73,58.03 127.73,75.01 128.447,75.727 130.227,75.727 130.279,75.779
  Bottom Layer w0.3: J2.8 69.236,84.62 69.873,85.257 ; v1(75.5,89) 73.616,89 69.873,85.257 ; v1@87.469,78.783 84.546,81.705 83.118,81.705 79.567,85.257 69.873,85.257 ; 130.279,75.779 134.671,75.779 134.892,76 v1(135,76)
GPIO_10: J2.10 J3.31 U1.24 | length 157.4
  Top Layer w0.3: J2.10 65.743,83.337 63.5,83.337 61.527,81.364 61.527,76.517 59.5,74.491 59.5,41.77 62.129,39.141 69.141,39.141 70,40 v1(73,40) ; v1(77.8,77.927) 78.435,77.292 78.435,76.632 79.959,75.108 81.737,75.108 81.979,75.35 U1.24 ; v1(116.281,35.179) 115.265,36.195 115.265,45.265 124.22,54.22 J3.31@126.46,54.22
  Bottom Layer w0.3: J2.10 73.647,82.08 v1(77.8,77.927) ; v1(73,40) 74.83,38.17 91,38.17 91.188,38.358 107.358,38.358 108.5,39.5 116.639,39.5 117.5,38.639 117.5,36.398 v1(116.281,35.179)
GPIO_11: J2.11 J3.32 U1.25 | length 169.7
  Top Layer w0.3: v1(62.357,42.062) 61.723,42.697 61.723,73.039 v1(62.357,73.673) ; U1.25 86.338,74.85 v1(87.655,73.533) ; v1(87,37) 87.708,37.708 87.708,39.117 88.976,40.386 88.976,49.476 91.588,52.088 v1(91.588,59.5) ; v1(116.408,38.557) 116.408,44.882 124.423,52.896 127.676,52.896 J3.32@129,54.22
  Bottom Layer w0.3: v1(62.357,42.062) 64.735,39.684 71.989,39.684 74.673,37 v1(87,37) 92.5,37 93,36.5 94.5,36.5 95.266,37.266 113.766,37.266 115.057,38.557 v1(116.408,38.557) ; v1(62.357,73.673) 59.512,76.517 59.512,78.092 60.96,79.54 J2.11 ; v1(87.655,73.533) 87.112,73.533 86.305,72.726 86.305,69.905 91.588,64.622 v1(91.588,59.5)
GPIO_12: J2.12 J3.33 U1.54 | length 73.1
  Top Layer w0.3: v1(90.324,73.997) 91.126,73.997 91.274,73.85 95.55,73.85 95.623,73.923 99.726,73.923 v1(105.479,68.17)
  Bottom Layer w0.3: J2.12 69.705,76.835 78.766,76.835 79.286,77.355 82.463,77.355 84.918,74.9 88.9,74.9 89.4,74.4 89.812,74.4 90.215,73.997 v1(90.324,73.997) ; v1(105.479,68.17) 105.479,65.437 115.849,55.067 123.073,55.067 J3.33@126.46,51.68
GPIO_13: J2.13 J3.35 U1.56 | length 177
  Top Layer w0.3: v1(60.591,77) 58.833,75.241 58.833,70.872 54.847,66.886 54.847,43.153 v1(62,36) ; U1.56 90.002,74.85 89.494,74.341 89.494,73.625 92.201,70.917 94.737,70.917 106.522,59.131 v1(110.524,59.131) ; v1(116.484,36.779) 117.238,37.533 117.238,39.918 J3.35@126.46,49.14
  Bottom Layer w0.3: v1(60.591,77) J2.13 ; v1(62,36) 67,36 69.5,33.5 72.5,33.5 73.5,34.5 114.205,34.5 v1(116.484,36.779) ; v1(110.524,59.131) 112.775,56.88 112.834,56.88 120.574,49.14 J3.35@126.46,49.14
GPIO_15: J2.15 J3.36 U1.39 | length 164
  Top Layer w0.3: v1(62.357,75.063) 62.063,75.063 60.5,73.499 60.5,42.294 62.37,40.424 69.262,40.424 72.06,43.222 v1(72.06,43.33) ; v1(75,44.5) 75.006,44.506 75.006,47.246 75,47.252 75,67.532 75.928,68.46 83.215,68.46 85.34,70.584 87.975,70.584 88.35,70.21 U1.39
  Bottom Layer w0.3: v1(62.357,75.063) 62.96,74.46 J2.15 ; v1(72.06,43.33) 73.23,44.5 v1(75,44.5) 78.102,44.5 87.796,54.194 88.484,54.194 88.829,53.848 90.152,53.848 91.526,52.474 104.526,52.474 112.5,44.5 121.5,44.5 124.5,41.5 129.449,41.5 130.28,42.331 130.28,47.442 129,48.722 J3.36@129,49.14
GPIO_16: J2.16 J3.37 U1.40 | length 88.9
  Top Layer w0.3: v1(86.88,62.12) 86.914,62.12 88.85,64.056 ; v1(88.14,53.364) 88.14,53.472 87.67,53.942 87.67,61.844 88.85,63.024 88.85,64.056 ; U1.40 88.85,64.056 ; v1(121.5,42.5) 125.433,46.433 126.373,46.433 J3.37
  Bottom Layer w0.3: J2.16 74.54,74.46 v1(86.88,62.12) ; v1(88.14,53.364) 91.003,50.5 103.5,50.5 111.579,42.421 121.138,42.421 121.141,42.423 121.423,42.423 v1(121.5,42.5)
GPIO_18: J2.18 J3.38 U1.51 | length 173.6
  Top Layer w0.3: J2.18 68.242,73.162 68.242,80.411 71.222,83.391 v1(71.222,84.049) ; U1.51 95.997,72.35 96.647,73 v1(97.612,73) ; v1(103.988,94.437) 109.55,100 115.352,100 118.042,102.691 124.741,102.691 134.087,93.345 134.087,51.761 129,46.674 J3.38@129,46.6
  Bottom Layer w0.3: v1(71.222,84.049) 72.003,84.83 77.883,84.83 82.745,79.969 83.99,79.969 88.106,75.852 90.026,75.852 90.508,75.37 95.242,75.37 v1(97.612,73) 97.612,74.112 107.803,84.303 113.03,84.303 113.5,84.773 113.5,87 111.143,89.357 105.143,89.357 103.607,90.893 103.607,94.056 v1(103.988,94.437)
GPIO_19: J2.19 J3.40 U1.52 | length 183.6
  Top Layer w0.3: v1(58,72.5) 53,67.5 53,43.215 63.215,33 76.674,33 79.33,35.656 79.33,39.17 77.5,41 v1(77.5,45.5) ; v1(93,71.747) 94.103,72.85 U1.52
  Bottom Layer w0.3: v1(58,72.5) 61.12,69.38 J2.19 ; v1(77.5,45.5) 78.499,45.5 87.619,54.621 88.66,54.621 88.975,54.306 106.291,54.306 114.098,46.5 121.621,46.5 ; v1(93,71.747) 93.108,71.747 93.277,71.578 93.363,71.578 114.441,50.5 117.609,50.5 125.409,42.7 127.72,42.7 J3.40
GPIO_21: J2.21 J3.3 U1.53 | length 267.2
  Top Layer w0.3: v1(56,64.5) 56.905,64.5 57.506,65.1 ; v1(58.67,69) 57.506,67.836 57.506,65.1 ; v1(76,36) 73.784,33.784 66.216,33.784 57.506,42.494 57.506,65.1 ; v1(92.976,72.957) 93.084,72.957 93.477,73.35 U1.53 ; v1(113.5,35.67) 113.5,49 v1(116,51.5) ; v1(125.197,95.656) 125.197,91.043 J3.3@126.46,89.78
  Bottom Layer w0.3: v1(56,64.5) 53.838,66.662 53.838,96.677 60.691,103.53 123.133,103.53 123.227,103.436 125.103,101.32 125.178,101.235 v1@125.178,95.675 ; v1(58.67,69) 60.83,66.84 J2.21 ; v1(76,36) 113.062,36 113.392,35.67 v1(113.5,35.67) ; v1(92.976,72.957) 93.692,72.957 111.631,55.018 112.482,55.018 v1(116,51.5)
GPIO_22: J2.22 J3.5 U1.2 | length 124
  Top Layer w0.3: J2.22 68.174,65.666 68.174,65.659 v1(69.342,64.491) ; v1(70.51,66.37) v1(70.51,75.971) ; U1.2 92.35,81.85 93.075,82.575 93.075,82.853 v1(93.152,82.93) ; v1(95.5,85.5) 95.5,83.341 96.213,82.628 96.954,82.628 v1(97.013,82.569) ; v1(105.91,85.877) 108.5,83.287 v1(108.5,82)
  Bottom Layer w0.3: v1(69.342,64.491) 69.342,65.202 v1(70.51,66.37) ; v1(70.51,75.971) 78.748,75.971 79.705,76.928 81.314,76.928 83.871,74.371 88.443,74.371 89.814,73 90.5,73 91.78,74.28 93.72,74.28 96.257,71.743 98.667,71.743 99.085,72.161 112.217,72.161 121.92,81.864 ; v1(93.152,82.93) 95.423,85.202 95.423,85.423 v1(95.5,85.5) ; v1(97.013,82.569) 97,82.582 97,84 101.562,88.562 103.226,88.562 v1(105.91,85.877) ; v1(108.5,82) 121.784,82 121.92,81.864 ; J3.5@126.46,87.24 123.495,84.275 123.495,82.495 122.864,81.864 121.92,81.864
GPIO_23: J2.23 J3.7 U1.3 | length 184.1
  Top Layer w0.3: U1.3 91.85,79.807 93.218,79.807 93.821,80.41 93.821,80.821 v1(94.5,81.5) ; v1(124.276,92.125) 124.276,92.079 124.606,91.75 124.606,86.554 J3.7@126.46,84.7
  Bottom Layer w0.2: 127.604,85.844 128.88,85.844 cw(c129,84.62) 129.111,85.845 cw(c129,84.62) 129.12,85.844 129.602,85.844 130.28,86.522
  Bottom Layer w0.3: J2.23 59.512,64.3 55.978,67.834 55.978,94.978 60,99 66.5,99 68.5,97 73,97 75,99 118.221,99 122.555,94.666 126.035,94.666 126.869,95.5 128.674,95.5 130.28,93.894 130.28,86.522 ; v1(94.5,81.5) 94.589,81.5 95.33,82.241 95.33,84.156 96.41,85.236 96.41,87.261 95.969,87.702 95.969,89.701 101.972,95.703 104.97,95.703 107.829,92.843 123.558,92.843 v1(124.276,92.125) v1@124.276,92.234 ; J3.7@126.46,84.7 127.604,85.844
GPIO_24: J2.24 J3.8 U1.4 | length 139.5
  Top Layer w0.3: U1.4 91.35,83.476 v1(91.999,84.125) ; v1(128.5,94.5) 129.503,94.5 132.607,91.396 132.607,88.307 J3.8@129,84.7
  Bottom Layer w0.2: 59.5,65.53 65.77,65.53
  Bottom Layer w0.3: 59.5,65.53 57.17,67.86 57.17,93.17 60,96 89.979,96 91.999,93.98 ; 65.77,65.53 J2.24 ; v1(91.999,84.125) 91.999,93.98 ; v1(128.5,94.5) 126.473,94.5 126.052,94.079 120.421,94.079 117.5,97 95.019,97 91.999,93.98
GPIO_26: J2.26 J3.10 U1.14 | length 165.6
  Top Layer w0.3: J2.26 69.85,61.76 71.341,63.251 71.341,78.148 75.692,82.499 81.128,82.499 83.922,79.705 85.115,79.705 ; v1@71.209,93.209 80.407,102.407 89.929,102.407 92.471,104.949 130.204,104.949 v1(135.052,100.101) ; v1(83.945,80.875) 85.115,79.705 ; U1.14 86.35,79.705 85.115,79.705 ; J3.10@129,82.16 131.34,84.5 v1(133,84.5)
  Bottom Layer w0.3: v1(71,93) 71.066,93.066 75.283,93.066 85.658,82.69 85.674,82.69 87.376,80.987 87.914,80.987 87.928,80.973 88.928,80.973 89.535,80.366 89.535,78.861 88.626,77.953 86.868,77.953 v1(83.945,80.875) ; v1(133,84.5) 135.416,86.916 135.416,99.629 135.052,99.993 v1(135.052,100.101)
GPIO_27: J2.27 J3.11 U1.15 | length 184.8
  Top Layer w0.3: J2.27 62.704,60.976 62.704,71.504 63.195,71.995 63.195,80.328 63.665,80.797 67.963,80.797 68.242,81.077 68.242,84.549 68.656,84.963 82.878,84.963 85.85,81.991 U1.15 ; v1@123.014,95.553 123.014,90.016 123.85,89.179 123.85,82.23 J3.11@126.46,79.62
  Bottom Layer w0.3: J2.27 63.302,59.22 54.857,67.665 54.857,96.203 59.658,101.003 66.503,101.003 68.5,103 73.676,103 74.989,101.687 117.5,101.687 117.5,100.773 121.273,97 122,97 122.963,96.037 122.963,95.604 v1(123.012,95.555)
GPIO_28: J2.28 J3.12 U1.16 | length 195.6
  Top Layer w0.3: v1(63.449,57.937) 64.934,57.937 65.747,58.75 67,58.75 J2.28 67,60.004 65.758,61.246 65.758,62.274 66.491,63.008 69.675,63.008 70.172,63.504 70.172,65.219 69.5,65.891 69.5,78 74.5,83 83.25,83 U1.16
  Bottom Layer w0.3: v1(63.449,57.937) 60.935,60.452 55.474,60.452 52.89,63.035 52.89,96.89 60.5,104.5 123.871,104.5 130.894,97.477 130.894,81.514 J3.12@129,79.62
GPIO_29: J2.29 J3.13 U1.17 | length 211.6
  Top Layer w0.3: J2.29 65.738,57.958 68.377,57.958 72.115,61.696 72.115,76.184 77.781,81.85 80.773,81.85 83.22,79.403 83.22,78.85 U1.17 ; J3.13@126.46,77.08 123.342,80.198 123.342,85.384 121.945,86.781 121.945,96.393 129.388,96.622 v1(131.724,94.285)
  Bottom Layer w0.3: J2.29 56.96,56.68 52,61.64 52,97.5 60,105.5 124.345,105.5 131.724,98.12 v1(131.724,94.285)
GPIO_31: J2.31 J3.15 U1.20 | length 106.5
  Top Layer w0.3: v1(68.5,68) 68.5,72.816 68.87,73.186 68.87,78.87 v1(74,84) ; U1.20 84.43,77.35 v1(85.065,76.715) ; v1(122.5,83.5) 122.5,78.5 J3.15@126.46,74.54
  Bottom Layer w0.2: 65.743,55.383 67.445,55.383 67.674,55.611 68.5,56.437
  Bottom Layer w0.3: J2.31 64.46,54.1 65.743,55.383 ; 68.5,56.437 v1(68.5,68) ; v1(74,84) 77.78,84 v1(85.065,76.715) 86.355,75.425 89.04,75.425 89.638,74.827 94.464,74.827 97.121,72.17 98.243,72.17 101.67,75.597 101.67,77.176 107.994,83.5 v1(122.5,83.5)
GPIO_32: J2.32 J3.16 U1.21 | length 186.2
  Top Layer w0.3: v1(63.398,52.857) 65.24,52.857 65.71,52.387 65.71,50.648 66.04,50.317 67.767,50.317 68.25,50.8 68.25,52.89 J2.32 72.792,59.932 72.792,75.967 76.327,79.502 77.47,79.502 78.867,78.105 78.867,77.38 79.319,76.928 81.373,76.928 81.452,76.85 U1.21
  Bottom Layer w0.3: v1(63.398,52.857) 60.892,50.351 60.892,34.474 62.805,32.56 132.662,32.56 135.096,34.994 135.096,68.444 J3.16@129,74.54
GPIO_33: J2.33 J3.18 U1.22 | length 168.8
  Top Layer w0.3: v1(80.543,76.098) 80.795,76.35 U1.22 ; v1(85.5,54) 85.5,62 v1(88,64.5)
  Bottom Layer w0.3: J2.33 63.17,50.31 63.17,43.104 63.576,42.697 ; v1(80.543,76.098) 80.543,69.825 85.868,64.5 v1(88,64.5) ; v1(85.5,54) 81.896,50.396 81.368,50.396 77.84,46.869 71.699,46.869 67.528,42.697 63.576,42.697 ; J3.18@129,72 132.427,68.573 132.427,51.799 132.924,51.302 132.924,43.389 130.029,40.494 118.215,40.494 117.014,41.696 81.022,41.696 80.355,41.029 65.244,41.029 63.576,42.697
GPIO_35: J2.35 J3.19 U1.23 | length 148.9
  Top Layer w0.3: J2.35 63.195,47.795 63.195,42.647 64.813,41.029 68.529,41.029 70,42.5 70,43.5 73,46.5 ; v1(74.5,40) 74.5,40.108 74,40.608 74,45.5 73,46.5 ; U1.23 87.654,75.85 89.006,74.498 89.006,73.284 89.146,73.144 89.146,71.755 88.402,71.011 84.705,71.011 82.58,68.887 75.472,68.887 74.353,67.768 74.353,54.853 73,53.5 73,46.5 ; v1(106.07,40.615) 106.909,41.453 109.677,41.453 110.513,42.289 110.513,53.513 111.5,54.5 117.365,54.5 120,57.135 120,63 J3.19@126.46,69.46
  Bottom Layer w0.3: v1(74.5,40) 74.54,40.04 105.496,40.04 v1@106.05,40.594
GPIO_36: J2.36 J3.21 U1.41 | length 90.6
  Top Layer w0.3: v1(88.5,61.5) 89.35,62.35 U1.41 ; v1(88.9,55.451) 88.897,55.453 88.897,59.506 v1(88.954,59.563) ; v1(111.5,50.5) 111.5,51.5 113.5,53.5 117.762,53.5 121,56.738 121,61.46 J3.21@126.46,66.92
  Bottom Layer w0.3: J2.36 67.059,49.119 76.863,49.119 88.5,60.756 ; v1(88.5,61.5) 88.5,60.756 ; v1@88.878,59.486 v1(88.954,59.563) 88.893,59.624 88.893,60.363 88.5,60.756 ; v1(88.9,55.451) 88.934,55.417 106.583,55.417 v1(111.5,50.5)
GPIO_37: J2.37 J3.22 U1.28 | length 144.8
  Top Layer w0.3: v1(76.455,50.545) 76.455,39.045 v1(76.5,39) ; U1.28 84.831,73.35 v1(84.988,73.508) ; J3.22@129,66.92 132.007,63.913 132.007,54.25 v1(133.257,53)
  Bottom Layer w0.2: 65.778,47.798 65.77,47.806 65.77,49.723 66.37,50.323 67.677,50.323
  Bottom Layer w0.3: J2.37 64.46,46.48 65.778,47.798 ; 67.677,50.323 68,50 75.869,50 76.414,50.545 v1(76.455,50.545) ; v1@76.479,50.545 87.67,61.736 87.67,61.844 88.83,63.004 88.83,64.844 84.988,68.685 v1(84.988,73.508) ; v1(76.5,39) 105.63,39 107.13,40.5 116.979,40.5 118.005,39.475 131.474,39.475 134.1,42.101 134.1,52.157 v1(133.257,53)
GPIO_38: J2.38 J3.23 U1.27 | length 131.3
  Top Layer w0.3: v1(67.843,41.859) 67.079,41.859 65.758,43.18 65.758,44.495 66.811,45.547 J2.38 70,49.52 70,54.5 73.601,58.101 73.601,75.962 74.639,77 77.423,77 80.573,73.85 U1.27 ; v1(104,43) 104,41.009 105.232,39.776 110.49,39.776 112.5,41.786 112.5,50.5 114.5,52.5 118.85,52.5 124.155,57.805 124.155,62.075 J3.23@126.46,64.38
  Bottom Layer w0.3: v1(67.843,41.859) 68.814,42.83 71.386,42.83 71.716,42.5 78.644,42.5 81.074,44.93 102.07,44.93 v1(104,43)
GPIO_40: J2.40 J3.24 U1.26 | length 105.1
  Top Layer w0.3: U1.26 85.688,74.35 86.947,73.092 v1(87.135,72.268) ; v1(115.976,49.022) 116.016,49.062 117.143,49.062 123.519,55.438 126.974,55.438 127.711,56.175 127.711,60.02 128.179,60.488 129.588,60.488 130.251,61.152 130.251,63.129 J3.24@129,64.38
  Bottom Layer w0.3: J2.40 70.844,47.824 77,47.824 86.676,57.5 90.762,57.5 92.418,59.156 ; v1(87.135,72.268) 92.418,66.985 92.418,59.156 ; v1(115.976,49.022) 115.96,49.038 114.462,49.038 105.838,57.662 93.912,57.662 92.418,59.156
LED_1: 1.A U1.57 | length 35.9
  Top Layer w0.3: v1(91.262,76.657) 92.12,75.35 U1.57 ; v1(101.892,87.719) 101.905,87.732 102.732,87.732 110.656,95.656 112.55,95.656 1.A
  Bottom Layer w0.3: v1(91.262,76.657) 94.259,76.657 101.838,84.236 101.838,87.664 v1(101.892,87.719)
LED_2: 2.A U1.58 | length 34
  Top Layer w0.3: U1.58 96.215,75.85 97.008,75.057 101.498,75.057 102.932,73.623 107.393,73.623 109.973,76.203 109.973,88.713 112.395,91.135 112.55,91.135 2.A
LED_3: 3.A U1.59 | length 33.6
  Top Layer w0.3: v1(92.092,77.495) 93.238,76.35 U1.59 ; v1(112.5,86) 112.5,87.95 3.A
  Bottom Layer w0.3: v1(92.092,77.495) 96,81.403 96,84 101.433,89.433 104.067,89.433 107.074,86.426 111.247,86.426 111.674,86 v1(112.5,86)
LED_4: 4.A U1.61 | length 33.9
  Top Layer w0.3: v1(90,77) 91.334,78.334 92.717,78.334 93.701,77.35 U1.61 ; v1(111,85.5) 111.077,85.423 111.477,85.423 112.55,84.35 4.A
  Bottom Layer w0.3: v1(90,77) 90,76.892 90.432,76.46 90.432,76.217 90.83,75.819 98.069,75.819 107.75,85.5 v1(111,85.5)
LED_5: 5.A U1.62 | length 21.2
  Top Layer w0.3: U1.62 96.369,77.85 98.219,76 v1(102.5,76) ; v1(112.5,78) 112.5,79.95 5.A
  Bottom Layer w0.3: v1(102.5,76) 110.5,76 v1(112.5,78)
LED_6: 6.A U1.29 | length 37.1
  Top Layer w0.3: U1.29 84.379,72.85 85.79,71.438 87.935,71.438 87.935,71.933 v1(88.316,72.314) ; v1(112.547,71.323) 112.55,71.326 6.A
  Bottom Layer w0.3: v1(88.316,72.314) 88.57,72.568 91.004,72.568 92.223,73.787 93.465,73.787 96.252,71 112.172,71 112.495,71.323 v1(112.547,71.323)
LED_PWR_K: D7.K R12.2 | length 3
  Top Layer w0.3: R12.2 D7.K
MCU_BOOT: pad.2 R9.2 U1.60 | length 14.5
  Top Layer w0.3: U1.60 96.65,76.85 97.95,75.55 101.609,75.55 102.159,75 103.839,75 104.389,75.55 R9.2@104.874,75.55 ; R9.2 106.185,75.685 pad.2@107.744,77.244
MCU_JTDI: J1.4 U1.50 | length 25.8
  Top Layer w0.3: U1.50 98.156,71.85 108.276,61.73 J1.4
MCU_NRST: C4.2 pad.3 R5.1 U1.7 | length 24.8
  Top Layer w0.3: U1.7 89.85,80.01 90.485,79.375 95.275,79.375 98.5,82.6 98.5,88.654 97.5,89.654 97.5,91.357 C4.2@97.65,91.357 ; C4.2 98.05,92.407 98.215,92.407 99.669,93.861 100.911,93.861 R5.1
MCU_OSC_IN: C1.1 U1.5 Y?.1 | length 11.2
  Top Layer w0.3: Y?.1@88.95,91.35 88.95,89.871 88.968,89.853 88.968,87.382 89.3,87.05 89.3,86.945 90.85,85.395 U1.5
MCU_OSC_OUT: R3.1 U1.6 | length 14.1
  Top Layer w0.3: R3.1 87.028,89.55 88.3,88.278 88.3,86 90.35,83.95 U1.6
MCU_PIN_1: J4.1 U1.33 | length 9.9
  Top Layer w0.3: J4.1 83.364,67.08 85.35,69.065 U1.33
MCU_PIN_2: J4.2 U1.34 | length 11.9
  Top Layer w0.3: J4.2 82.04,64.54 85.85,68.35 U1.34
MCU_PIN_3: J4.3 U1.35 | length 13.7
  Top Layer w0.3: J4.3 80.49,62 86.35,67.86 U1.35
MCU_PIN_4: J4.4 U1.36 | length 15.9
  Top Layer w0.3: J4.4 79.46,59.46 86.85,66.85 U1.36
MCU_PIN_5: J4.5 U1.37 | length 17.8
  Top Layer w0.3: J4.5 78.066,56.92 87.35,66.204 U1.37
MCU_PIN_6: J4.6 U1.38 | length 19.8
  Top Layer w0.3: J4.6 76.864,54.383 77.039,54.558 87.17,64.844 87.656,65.33 87.674,65.33 87.85,65.506 U1.38
MCU_SWCLK: J1.5 U1.49 | length 26.6
  Top Layer w0.3: U1.49 97.053,71.35 108.418,59.985 115.705,59.985 J1.5
MCU_SWDIO: J1.6 U1.46 | length 31.5
  Top Layer w0.3: U1.46 91.85,70.434 93.157,70.434 105.299,58.293 114.857,58.293 J1.6
MCU_SWITCH_1: R1.2 SW1.2 U1.42 | length 30.5
  Top Layer w0.3: SW1.2 81.35,47.3 80.5,48.15 R1.2 83.363,50.55 84.476,51.664 88.552,51.664 89.806,52.917 89.806,54.998 89.838,55.03 89.838,55.718 89.806,55.75 89.806,68.606 89.85,68.65 U1.42
MCU_SWITCH_2: R2.2 SW2.2 U1.43 | length 25.7
  Top Layer w0.3: R2.2 86.5,48.15 87.35,47.3 SW2.2 ; R2.2@86.516,50.566 88.732,50.566 90.713,52.547 90.713,64.787 90.35,65.15 U1.43
MCU_SWO: J1.3 U1.55 | length 25.8
  Top Layer w0.3: U1.55 100.782,74.35 110.862,64.27 J1.3
NetC3_2: C3.2 U1.30 | length 9.5
  Top Layer w0.3: C3.2 77.994,75.143 80.787,72.35 U1.30
NetD1_K: 1.K R4.2 | length 4.1
  Top Layer w0.5: 1.K R4.2
NetD2_K: 2.K R6.2 | length 4.1
  Top Layer w0.5: 2.K R6.2
NetD3_K: 3.K R7.2 | length 4.1
  Top Layer w0.5: 3.K R7.2
NetD4_K: 4.K R8.2 | length 4.1
  Top Layer w0.5: 4.K R8.2
NetD5_K: 5.K R10.2 | length 4
  Top Layer w0.5: 5.K R10.2@118.5,80
NetD6_K: 6.K R11.2 | length 4.1
  Top Layer w0.5: 6.K R11.2
USB_D_N: J5.2 U1.44 | length 36.8
  Top Layer w0.26: J5.2 89.943,34.903 89.943,48.099 93.172,51.328 93.172,63.328 92.5,64 92.189,64.311 90.868,65.632 90.868,68.604 90.858,68.614 90.858,69.292 U1.44
USB_D_P: J5.3 U1.45 | length 36.8
  Top Layer w0.26: J5.3 90.407,34.903 90.407,47.907 93.636,51.136 93.636,63.52 91.332,65.824 91.332,68.604 91.342,68.614 91.342,69.292 U1.45
VBUS: C12.2 FB1.1 J5.1 | length 15.8
  Top Layer w0.4: J5.1 89.225,34.785 89.225,34.041 89.763,33.502 98.426,33.502 ; C12.2@99.168,35.667 99.168,34.245 98.426,33.502 ; FB1.1 101.498,33.502 98.426,33.502
XTAL_IN: C2.1 R3.2 Y?.3 | length 7.2
  Top Layer w0.3: R3.2 83,94.357 83.15,94.357 83.857,93.65 Y?.3@87.05,93.65
pads on no net: J2.2 J2.4 J5.4 J5.6 J5.7 J5.8 J5.9 J5.10 J5.11 SW1.3 SW1.4 SW2.3 SW2.4

## Polygon pours and split planes (outlines as drawn)
GND on Int1 (GND) "GND_L02_P003" (solid, pour order 3): 51.5,103.46 cw(c54.04,103.46) 54.04,106 134.46,106 cw(c134.46,103.46) 137,103.46 137,34.54 cw(c134.46,34.54) 134.46,32 54.04,32 cw(c54.04,34.54) 51.5,34.54 51.5,78
3V3 on Int2 (PWR) "3V3_L03_P004" (solid, pour order 4): 51.5,103.46 cw(c54.04,103.46) 54.04,106 134.46,106 cw(c134.46,103.46) 137,103.46 137,34.54 cw(c134.46,34.54) 134.46,32 54.04,32 cw(c54.04,34.54) 51.5,34.54 51.5,78

## Silkscreen, mask and mechanical layers (free items; w line width, h text height)
Top Overlay:
  lines w0.254: 100.306,83.486 ccw(c100.306,83.857) 100.677,83.857 100.677,84.986 ; 107.5,79.5 107.5,81.304 ; 96,85.5 ccw(c96.5,85.5) 96.5,85 98,85 100.5,85 ccw(c100.5,85.5) 101,85.5 101,86.5 ccw(c100.5,86.5) 100.5,87 96.5,87 ccw(c96.5,86.5) 96,86.5 96,85.5 ; 102.793,81.842 ccw(c103.293,81.842) 103.293,81.342 105.293,81.342 107.293,81.342 ccw(c107.293,81.842) 107.793,81.842 107.793,82.842 ccw(c107.293,82.842) 107.293,83.342 103.293,83.342 ccw(c103.293,82.842) 102.793,82.842 102.793,81.842
  text "A" at 64.019,99.5 h5
  text "B" at 126.297,99.5 h5
  text "NRST" at 96.667,85.5 h1
  text "Boot" at 103.627,81.842 h1
  text "Sailbot" at 91.579,54.067 h6

## Text inside footprints (layer, text, board x,y; h text height)
1: Mechanical 13 "+" at 111.733,95 h1 r180
2: Mechanical 13 "+" at 111.733,91 h1 r180
3: Mechanical 13 "+" at 111.733,87 h1 r180
4: Mechanical 13 "+" at 111.733,83 h1 r180
5: Mechanical 13 "+" at 111.733,79 h1 r180
6: Mechanical 13 "+" at 111.733,75 h1 r180
D7: Mechanical 13 "+" at 92.5,48.217 h1 r90